# EAGLE board BBQ_Blower (EAGLE 9.2.0)
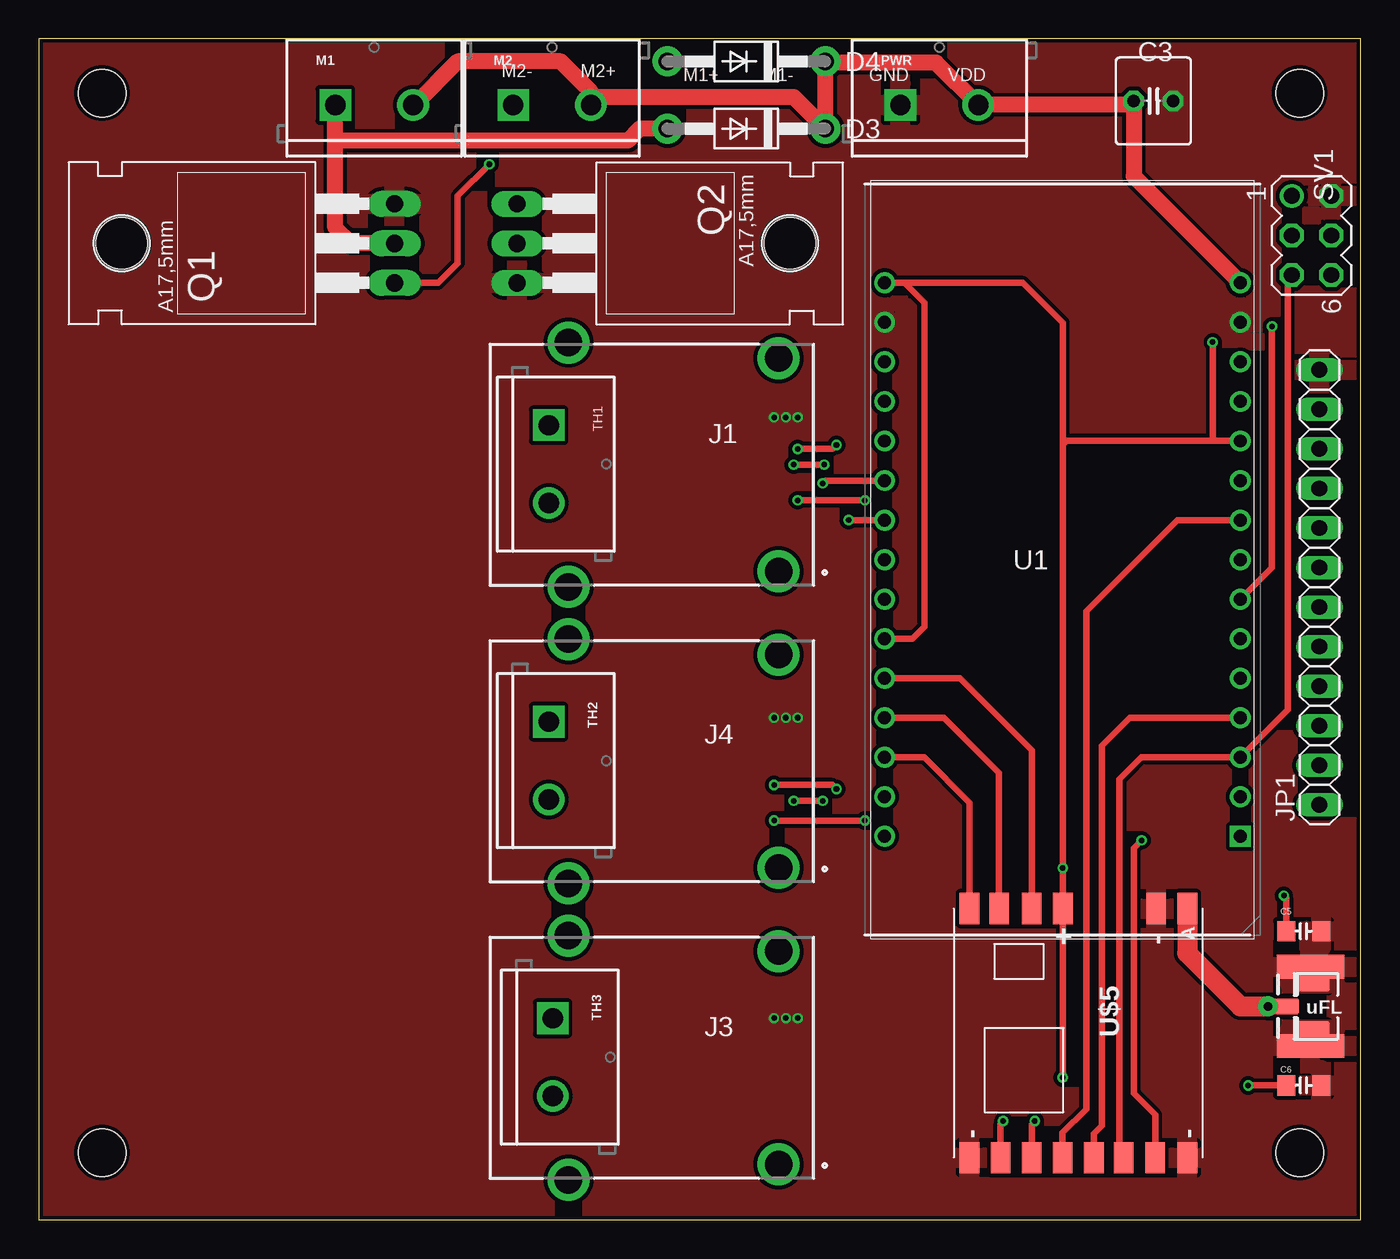
[diagram p0: board, top side]
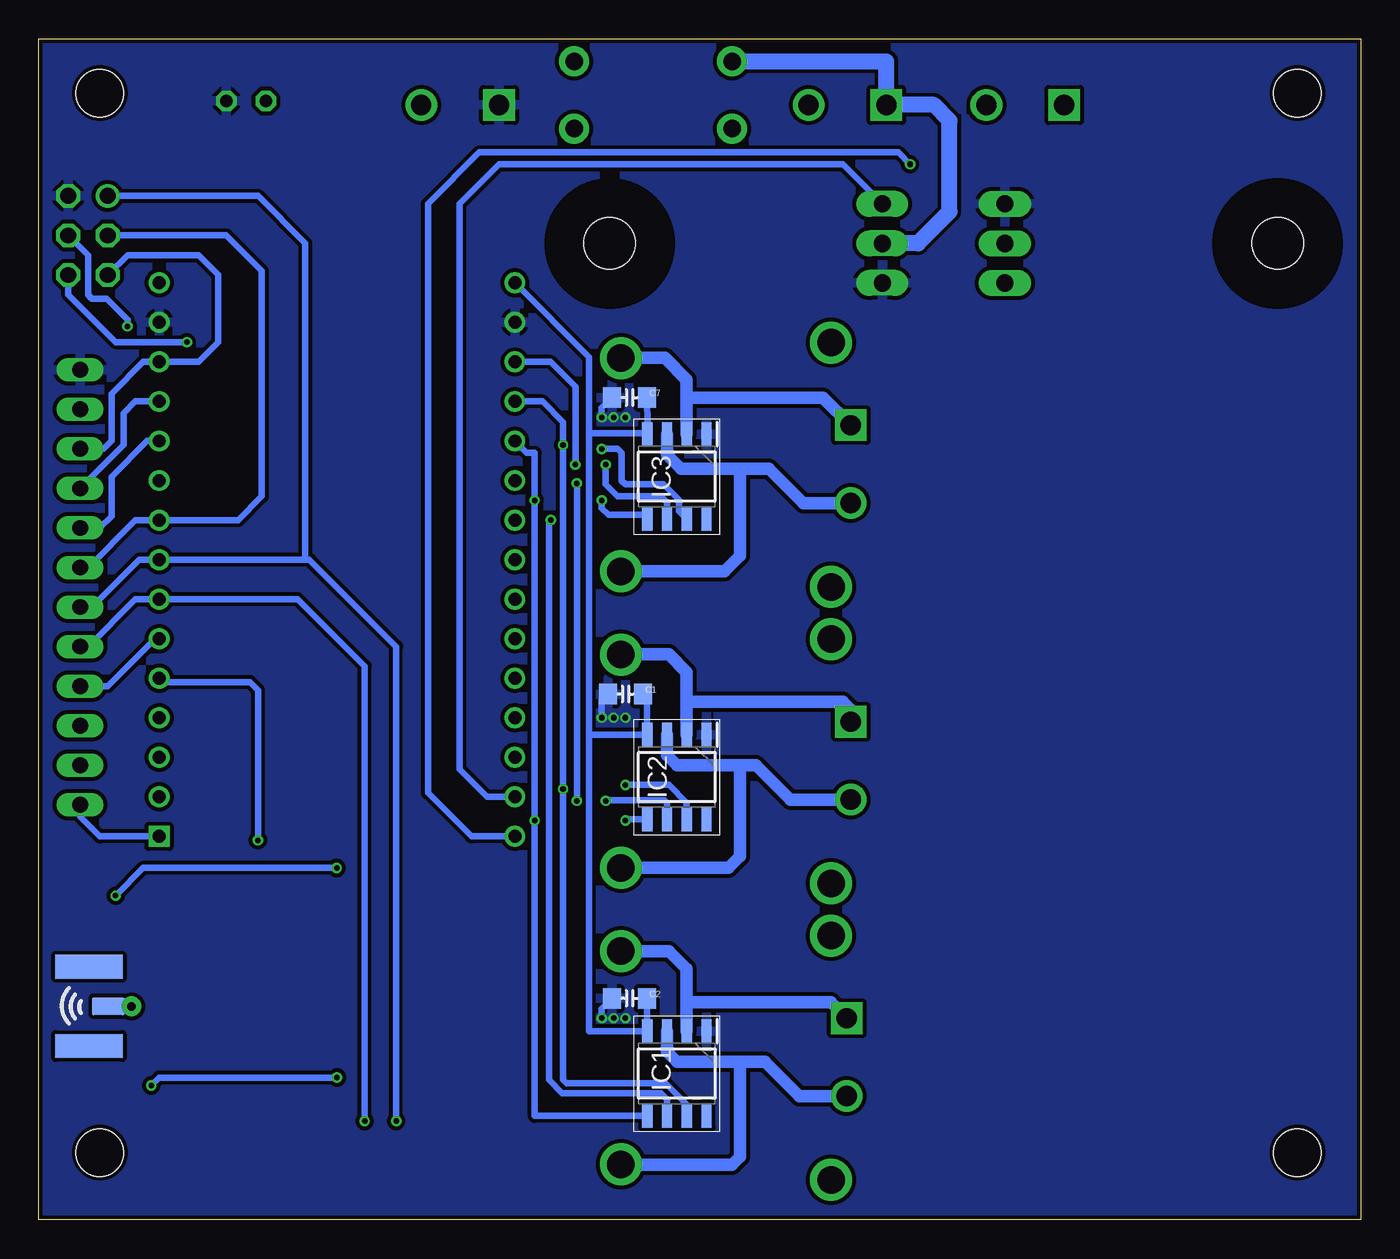
[diagram p1: board, bottom side, seen from below]

Size 84.94 x 75.87 mm. Coordinates in mm from the lower left corner, seen from the top.
Outline: 0,0 84.94,0 84.94,75.87 0,75.87 0,0
Copper layers (1*16): Top 0.035mm / dielectric 1.5mm / Bottom 0.035mm
Design rules "seeed-studio-2-layer": minimum track width 6mil, minimum drill 12mil, track to track 6mil, track to pad 6mil, pad to pad 6mil, via to via 6mil, smd to smd 0mil, copper to edge 10mil, drill to drill 10mil, minimum pad ring 10mil, minimum via ring 6mil, stop-mask expansion 2mil, vias tented up to drill 100mil, thermal gap 10mil
Net classes: 0 default: width 0.305 mm, drill 0.356 mm, clearance 0.254 mm; 1 POWER: width 1.905 mm, clearance 0.381 mm
Holes 3.05 mm at 4.06,72.39 4.06,4.32 81.03,4.32 81.03,72.39

## Footprints (pad centres in the part's own frame; a part is rotated, then mirrored left to right if it is on the bottom)
0805-CAP-LARGEPADS = smd 1.156 x 1.3: 1 -1.127,0; 2 1.127,0
C025-060X050 = drill 0.813 octagon: 1 -1.27,0; 2 1.27,0
DO41-10 = drill 1.118 pad 1.93: A 5.08,0; C -5.08,0
SOIC127P600X175-8N = smd 1.525 x 0.65: 1 -2.712,1.905; 2 -2.712,0.635; 3 -2.712,-0.635; 4 -2.712,-1.905; 5 2.712,-1.905; 6 2.712,-0.635; 7 2.712,0.635; 8 2.712,1.905
PCC-SMP = drill 1.77 pad 2.7: 1 2.25,6.85; 2 2.25,-6.85; 3 15.75,7.85; 4 15.75,-7.85
SMA_UFL_PAD_TINY = smd 1.524 x 1.016: ANT1 -3.843,0 | drill 0.559 pad 1.27: ANT2 -5.08,0 | smd 2.032 x 1.143 bottom: ANT3 -3.589,0 | smd 2.2 x 1.016: GND1 -2.223,1.47; GND2 -2.223,-1.47 | smd 4.318 x 1.524: GND3 -2.349,-2.54; GND4 -2.349,2.54 | smd 4.318 x 1.524 bottom: GND5 -2.349,2.54; GND6 -2.349,-2.54
1X12 = drill 1.016 long: 1 -13.97,0; 2 -11.43,0; 3 -8.89,0; 4 -6.35,0; 5 -3.81,0; 6 -1.27,0; 7 1.27,0; 8 3.81,0; 9 6.35,0; 10 8.89,0; 11 11.43,0; 12 13.97,0
SCREWTERMINAL-5MM-2 = drill 1.3 pad 2.032 square: 1 0,0 | drill 1.3 pad 2.032: 2 5,0
TO220 = drill 1.118 long: 1 -2.54,-6.35; 2 0,-6.35; 3 2.54,-6.35 | hole 3.302: 0,11.176
MA03-2 = drill 1.016: 1 -2.54,-1.27 | drill 1.016 octagon: 2 -2.54,1.27; 3 0,-1.27; 4 0,1.27; 5 2.54,-1.27; 6 2.54,1.27
DIP2286W64P254L4826H735Q30N = drill 0.835 pad 1.235 square: 1 -11.43,17.78 | drill 0.835 pad 1.235: 2 -11.43,15.24; 3 -11.43,12.7; 4 -11.43,10.16; 5 -11.43,7.62; 6 -11.43,5.08; 7 -11.43,2.54; 8 -11.43,0; 9 -11.43,-2.54; 10 -11.43,-5.08; 11 -11.43,-7.62; 12 -11.43,-10.16; 13 -11.43,-12.7; 14 -11.43,-15.24; 15 -11.43,-17.78; 16 11.43,-17.78; 17 11.43,-15.24; 18 11.43,-12.7; 19 11.43,-10.16; 20 11.43,-7.62; 21 11.43,-5.08; 22 11.43,-2.54; 23 11.43,0; 24 11.43,2.54; 25 11.43,5.08; 26 11.43,7.62; 27 11.43,10.16; 28 11.43,12.7; 29 11.43,15.24; 30 11.43,17.78
RFM95 = smd 2 x 1.27: ANT 5.777,-7; DIO0 5.777,3; DIO1 5.779,5.095; DIO2 5.779,7; DIO5 -10.225,-4.936; GND 5.777,-5; GND1 -10.223,7; GND2 -10.23,-7; MISO -10.23,5; MOSI -10.225,3; NSS -10.223,-1; RST -10.223,-2.905; SCK -10.23,1.012; VDD 5.777,1

## Placement (x,y rotation side)
C1  1uF  [0805-CAP-LARGEPADS]  47.24,33.78 0 bottom
C2  1uF  [0805-CAP-LARGEPADS]  46.99,14.22 0 bottom
C3  [C025-060X050]  71.63,71.88 0 top
C5  10uF  [0805-CAP-LARGEPADS]  81.28,18.54 180 top
C6  1uF  [0805-CAP-LARGEPADS]  81.28,8.64 180 top
C7  1uF  [0805-CAP-LARGEPADS]  46.99,52.83 0 bottom
D3  1N4004  [DO41-10]  45.47,70.1 180 top
D4  1N4004  [DO41-10]  45.47,74.42 180 top
IC1  MAX31855RASA+  [SOIC127P600X175-8N]  43.94,9.4 270 bottom
IC2  MAX31855RASA+  [SOIC127P600X175-8N]  43.94,28.45 270 bottom
IC3  MAX31855RASA+  [SOIC127P600X175-8N]  43.94,47.75 270 bottom
J1  PCC-SMP-K-100-R-ROHS  [PCC-SMP]  49.78,48.51 180 top
J3  PCC-SMP-K-100-R-ROHS  [PCC-SMP]  49.78,10.41 180 top
J4  PCC-SMP-K-100-R-ROHS  [PCC-SMP]  49.78,29.46 180 top
J$2  ANTENNATINY  [SMA_UFL_PAD_TINY]  84.07,13.72 0 top
JP1  [1X12]  82.3,40.64 90 top
M1  [SCREWTERMINAL-5MM-2]  19.05,71.63 0 top
M2  [SCREWTERMINAL-5MM-2]  30.48,71.63 0 top
PWR  [SCREWTERMINAL-5MM-2]  55.37,71.63 0 top
Q1  BUZ10  [TO220]  16.51,62.74 90 top
Q2  BUZ10  [TO220]  37.08,62.74 270 top
SV1  [MA03-2]  81.79,63.25 270 top
TH1  [SCREWTERMINAL-5MM-2]  32.77,51.05 270 top
TH2  [SCREWTERMINAL-5MM-2]  32.77,32 270 top
TH3  [SCREWTERMINAL-5MM-2]  33.02,12.95 270 top
U1  113990105  [DIP2286W64P254L4826H735Q30N]  65.79,42.42 180 top
U$5  RFM95  [RFM95]  66.8,14.22 90 top

## Library data of the parts
C1 C2 C5-C7 J$2 U$5 = _c2h
C3 D3 D4 JP1 = adafruit
IC1-IC3 = MAX31855RASA+; DESCRIPTION: Thermocouple-to-Digital, type R SOIC8 Maxim MAX31855RASA+, Thermocouple Amplifier, 3.3 V, 8-Pin SOIC; HEIGHT: 1.75mm; MANUFACTURER_NAME: Maxim Integrated; MANUFACTURER_PART_NUMBER: MAX31855RASA+; RS_PART_NUMBER: 7833891P; SUPPLIER_NAME: RS
J1 J3 J4 = PCC-SMP-K-100-R-ROHS; DESCRIPTION: NEWPORT ELECTRONICS - PCC-SMP-K-100-R-ROHS - CIRCUIT BOARD THERMOCOUPLE, K TYPE; HEIGHT: mm; MANUFACTURER_NAME: NEWPORT ELECTRONICS; MANUFACTURER_PART_NUMBER: PCC-SMP-K-100-R-ROHS; SUPPLIER_NAME: RS
M1 M2 PWR TH1-TH3 = SparkFun-Connectors; SF_SKU: PRT-08432
Q1 Q2 = transistor-fet
SV1 = con-lstb; OC_FARNELL: unknown; OC_NEWARK: unknown
U1 = 113990105; DESCRIPTION: NodeMCU DEVKIT V1.0; HEIGHT: 7.35mm; MANUFACTURER_NAME: Seeed Studio; MANUFACTURER_PART_NUMBER: 113990105; SUPPLIER_NAME: RS

## Nets
3V3: C1.2 C2.2 C5.2 C6.2 C7.2 IC1.4 IC2.4 IC3.4 JP1.8 SV1.6 U1.11 U1.16 U1.25 U$5.VDD
A0: JP1.1 U1.1
ANT: J$2.ANT1 J$2.ANT2 J$2.ANT3 U$5.ANT
BLOWER1: D4.A M2.1 Q2.2
BLOWER2: D3.A M1.1 Q1.2
BLOWER_1: Q1.1 U1.30
BLOWER_2: Q2.1 U1.29
CLK: JP1.7 SV1.3 U1.9 U$5.SCK
CS_1: IC1.6 U1.22
CS_2: IC2.6 U1.21
CS_3: IC3.6 U1.18
CS_LORA: U1.4 U$5.NSS
D1: JP1.4 U1.6
D2: JP1.3
D3: JP1.2
D4: JP1.11
DIO0: U1.26 U$5.DIO0
DIO1: U1.27 U$5.DIO1
DIO2: U1.28 U$5.DIO2
DIO5: U1.5 U$5.DIO5
EN: JP1.9 U1.12
GND: C1.1 C2.1 C3.2 C5.1 C6.1 C7.1 IC1.1 IC2.1 IC3.1 J$2.GND1 J$2.GND2 J$2.GND3 J$2.GND4 JP1.12 PWR.1 Q1.3 Q2.3 SV1.2 U1.14 U1.17 U$5.GND U$5.GND1 U$5.GND2
GND(1): U1.10
GND(4): U1.24
MISO: JP1.6 SV1.1 U1.8 U$5.MISO
MOSI: JP1.5 SV1.4 U1.7 U$5.MOSI
RST: JP1.10 SV1.5 U1.3 U1.13 U$5.RST
SCK: IC1.5 IC2.5 IC3.5 U1.20
SO: IC1.7 IC2.7 IC3.7 U1.19
SO_1: U1.23
T1+: IC1.3 J3.1 TH3.2
T1-: IC1.2 J3.2 TH3.1
T2+: IC2.3 J4.1 TH2.2
T2-: IC2.2 J4.2 TH2.1
T3+: IC3.3 J1.1 TH1.2
T3-: IC3.2 J1.2 TH1.1
VDD: C3.1 D3.C D4.C M1.2 M2.2 PWR.2 U1.15

## Tracks (layer width: path | path; a pad name or v marks a point on that pad's centre or on a via)
3V3  (via drill 0.36)
  Top 0.406: U1.25 56.13,37.34 56.9,38.1 56.9,58.93 55.63,60.2 U1.16 63.25,60.2 65.8,57.64 65.8,49.78 | 65.8,49.78 v65.8,22.61 U$5.VDD 65.8,9.16 v65.79,9.14 | v80.01,20.83 80.15,20.68 C5.2 | v77.72,8.64 C6.2 | U1.11 75.44,50.04 | 75.44,50.04 66.06,50.04 65.8,49.78 | v75.44,56.39 75.44,50.04
  Bottom 0.406: IC3.4 45.83,50.48 45.83,50.8 | 45.83,50.8 45.83,51.05 C7.2 | C2.2 45.85,14.21 IC1.4 49.58,12.11 49.58,31.24 | C1.2 45.85,33.51 IC2.4 49.5,31.16 49.58,31.24 | 49.58,50.55 46.08,50.55 45.83,50.8 | v65.8,22.61 78.23,22.61 v80.01,20.83 | v65.79,9.14 77.22,9.14 v77.72,8.64 | U1.16 49.58,55.42 49.58,50.55 | 49.58,31.24 49.58,50.55 | U1.11 77.98,50.04 80.26,47.75 80.26,45.21 81.03,44.45 JP1.8 | v75.44,56.39 80.01,56.39 83.06,59.44 SV1.6
A0
  Bottom 0.406: U1.1 81.03,24.64 82.3,25.91 JP1.1
ANT
  Top 1.016: J$2.ANT2 J$2.ANT1
  Top 1.27: U$5.ANT 73.8,17.13 77.22,13.72 J$2.ANT2
  Bottom 1.016: J$2.ANT2 J$2.ANT3
BLOWER1
  Top 1.016: Q2.2 30.48,62.99
  Bottom 1.016: D4.A 30.48,74.42 M2.1 27.43,71.63 26.42,70.61 26.42,64.77 28.45,62.74 Q2.2
BLOWER2
  Top 1.016: Q1.2 20.07,62.74 19.05,63.75 19.05,69.34 | 19.05,69.34 M1.1 | D3.A 38.61,70.1 37.85,69.34 19.05,69.34
BLOWER_1  (via drill 0.36)
  Top 0.406: v28.96,67.82 26.92,65.79 26.92,61.47 25.65,60.2 Q1.1
  Bottom 0.406: U1.30 57.15,24.64 59.94,27.43 59.94,65.28 56.64,68.58 29.72,68.58 v28.96,67.82
BLOWER_2
  Bottom 0.406: U1.29 56.13,27.18 57.91,28.96 57.91,65.28 55.37,67.82 33.27,67.82 Q2.1
CLK
  Top 0.406: U$5.SCK 65.79,5.59 67.31,7.11 67.31,39.12 73.15,44.96 U1.9
  Bottom 0.406: JP1.7 81.79,41.91 78.74,44.96 U1.9 72.14,44.96 70.61,46.48 70.61,60.96 72.9,63.25 SV1.3
CS_1  (via drill 0.36)
  Top 0.406: v52.05,44.96 U1.22
  Bottom 0.406: IC1.6 44.58,7.75 44.96,8.13 51.31,8.13 52.17,8.99 52.17,44.83 v52.05,44.96
CS_2  (via drill 0.36)
  Top 0.406: v48.51,26.92 v50.37,26.92 | v50.37,47.32 50.55,47.5 U1.21
  Bottom 0.406: IC2.6 44.58,26.8 44.74,26.96 48.48,26.96 v48.51,26.92 | v50.37,26.92 v50.37,47.32
CS_3  (via drill 0.36)
  Top 0.406: v50.47,48.51 v48.51,48.51
  Bottom 0.406: IC3.6 44.58,46.1 44.96,46.48 47.75,46.48 48.51,47.24 v48.51,48.51 | v50.47,48.51 50.47,53.52 52.07,55.12 U1.18
CS_LORA
  Top 0.406: U$5.NSS 67.8,5.53 68.31,6.03 68.31,30.46 70.1,32.26 U1.4
D1
  Bottom 0.406: U1.6 77.47,37.34 80.52,34.29 JP1.4
DIO0
  Top 0.406: U$5.DIO0 63.8,30.18 59.18,34.8 U1.26
DIO1
  Top 0.406: U$5.DIO1 61.71,28.72 58.17,32.26 U1.27
DIO2
  Top 0.406: U$5.DIO2 59.8,26.81 56.9,29.72 U1.28
DIO5  (via drill 0.36)
  Top 0.406: U$5.DIO5 71.74,6.75 70.36,8.13 70.36,23.88 v70.87,24.38
  Bottom 0.406: U1.5 76.96,34.54 71.37,34.54 70.87,34.04 v70.87,24.38
EN
  Bottom 0.406: JP1.9 79.5,49.78 79.5,51.82 78.74,52.58 U1.12
GND  (via drill 0.36)
  Top 0.406: J$2.GND4 81.85,16.13 J$2.GND1 | J$2.GND3 81.72,12.12 J$2.GND2
  Bottom 0.406: C1.1 48.77,33.38 v48.77,32.26 | C2.1 48.77,13.57 v48.77,12.95 | C7.1 48.77,52.18 v48.77,51.56
  other vias: 48.01,32.26 47.24,32.26 48.01,12.95 47.24,12.95 48.01,51.56 47.24,51.56
  pour Bottom: -3.81,-2.79 89.15,-2.79 89.15,79.5 -3.56,79.5 -4.06,78.99 -4.06,-2.54
  pour Top: -3.56,79.5 88.9,79.5 89.15,79.25 89.15,-2.29 89.41,-2.54 -3.81,-2.54 -4.32,-3.05 -4.32,78.99 -3.81,79.5 -3.81,78.99
MISO  (via drill 0.36)
  Top 0.406: U$5.MISO 61.8,6.18 v61.98,6.35
  Bottom 0.406: v61.98,6.35 61.98,36.83 67.56,42.42 67.82,42.42 | 67.82,42.42 U1.8 78.49,42.42 81.53,39.37 JP1.6 | SV1.1 70.87,65.79 67.82,62.74 67.82,42.42
MOSI  (via drill 0.36)
  Top 0.406: U$5.MOSI 63.8,6.14 v64.01,6.35 | U1.7 79.25,41.91 v79.25,57.4
  Bottom 0.406: v64.01,6.35 64.01,35.56 68.33,39.88 U1.7 78.74,39.88 81.79,36.83 JP1.5 | v79.25,57.4 79.25,57.83 80.6,59.18 81.53,59.18 81.79,59.44 81.79,61.98 SV1.4
RST
  Top 0.406: U$5.RST 69.45,4.26 69.45,28.3 70.87,29.72 U1.3 80.26,32.77 80.26,60.45 SV1.5
  Bottom 0.406: SV1.5 79.25,61.98 74.68,61.98 73.41,60.71 73.41,56.39 74.68,55.12 U1.13 78.23,55.12 80.26,53.09 80.26,50.04 80.77,49.53 JP1.10
SCK  (via drill 0.36)
  Top 0.406: v47.24,25.65 v53.09,25.65 | v48.77,46.23 v53.09,46.23
  Bottom 0.406: U1.20 53.59,49.28 53.09,49.28 v53.09,46.23 v53.09,25.65 53.09,6.69 IC1.5 | IC2.5 47.16,25.74 v47.24,25.65 | IC3.5 46.1,45.29 48.34,45.29 48.77,45.72 v48.77,46.23
SO  (via drill 0.36)
  Top 0.406: v51.26,27.69 51,27.94 v47.24,27.94 | v48.77,49.53 51,49.53 v51.26,49.78
  Bottom 0.406: IC1.7 43.29,6.71 43.29,7.39 44.68,8.79 51.03,8.79 51.26,9.01 v51.26,27.69 v51.26,49.78 51.26,51.26 52.58,52.58 U1.19 | IC2.7 43.31,26.8 44.45,27.94 v47.24,27.94 | IC3.7 43.8,45.53 43.8,46.25 44.79,47.24 47.24,47.24 47.5,47.5 47.5,49.28 47.75,49.53 v48.77,49.53
T1+
  Bottom 0.813: IC1.3 44.58,10.79 43.94,10.16 39.88,10.16 | TH3.2 36.07,7.95 38.27,10.16 39.88,10.16 | J3.1 40.39,3.56 39.88,4.06 39.88,10.16
T1-
  Bottom 0.813: IC1.2 43.31,13.97 | 43.31,13.97 43.31,16.13 44.45,17.27 J3.2 | TH3.1 34.04,13.97 43.31,13.97
T2+
  Bottom 0.813: IC2.3 44.58,29.84 43.94,29.21 39.88,29.21 | 39.88,29.21 38.86,29.21 36.66,27 TH2.2 | J4.1 40.63,22.61 39.88,23.37 39.88,29.21
T2-
  Bottom 0.813: IC2.2 43.31,33.27 | 43.31,33.27 43.31,35.18 44.45,36.32 J4.2 | TH2.1 32.77,32.77 33.27,33.27 43.31,33.27
T3+
  Bottom 0.813: IC3.3 44.58,49.15 43.69,48.26 39.88,48.26 | TH1.2 35.81,46.05 38.02,48.26 39.88,48.26 | J1.1 40.89,41.66 39.88,42.67 39.88,48.26
T3-
  Bottom 0.813: IC3.2 43.31,52.83 | 43.31,52.83 43.31,53.98 44.7,55.37 J1.2 | TH1.1 34.54,52.83 43.31,52.83
VDD
  Top 1.016: U1.15 70.36,67.06 C3.1 70.1,71.63 PWR.2 57.65,74.35 50.62,74.35 | 50.62,74.35 D4.C | 50.62,74.35 50.55,74.27 D3.C 48.51,72.14 35.99,72.14 M2.2 35.48,72.47 33.53,74.42 26.92,74.42 24.13,71.63 M1.2

## Text on the board
tPlace: M2- | M2+ | M1+ | M1- | GND | VDD
tStop: Board: BBQ Controller / Author: Cody Fischer / Date: November 2018 / Rev: 1.0